# Altium PCB Power_Board_Board.PcbDoc
Units mm, origin at the board's own origin, x right, y up, seen from the top; angles counter-clockwise.
Board outline 180 x 200 mm, 2 copper layers (Top Layer, Bottom Layer), stack 1.671 mm thick; 109 components, 45 nets, 352 pads, 136 vias.
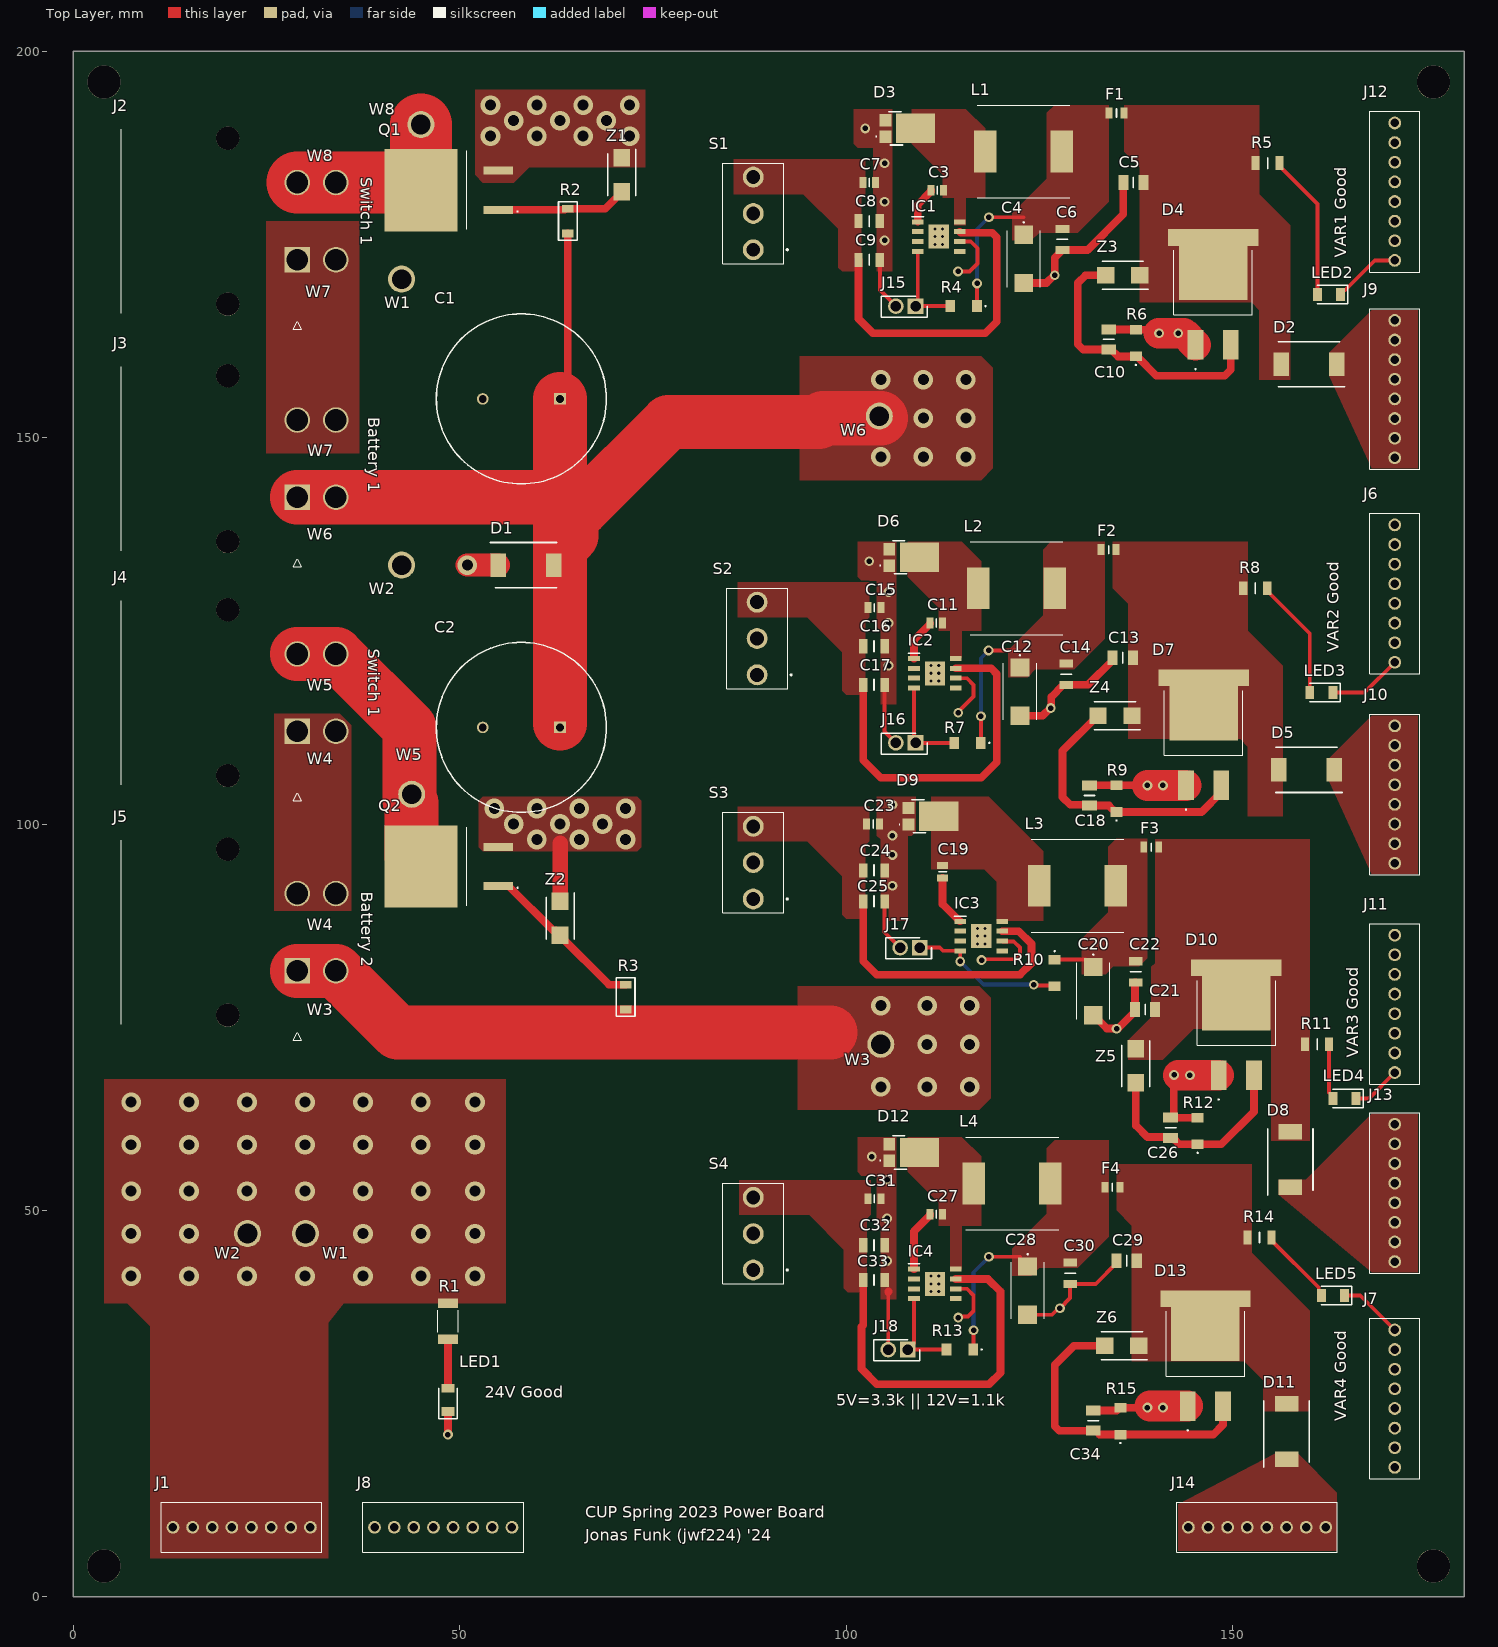
[diagram p0: Top Layer view]
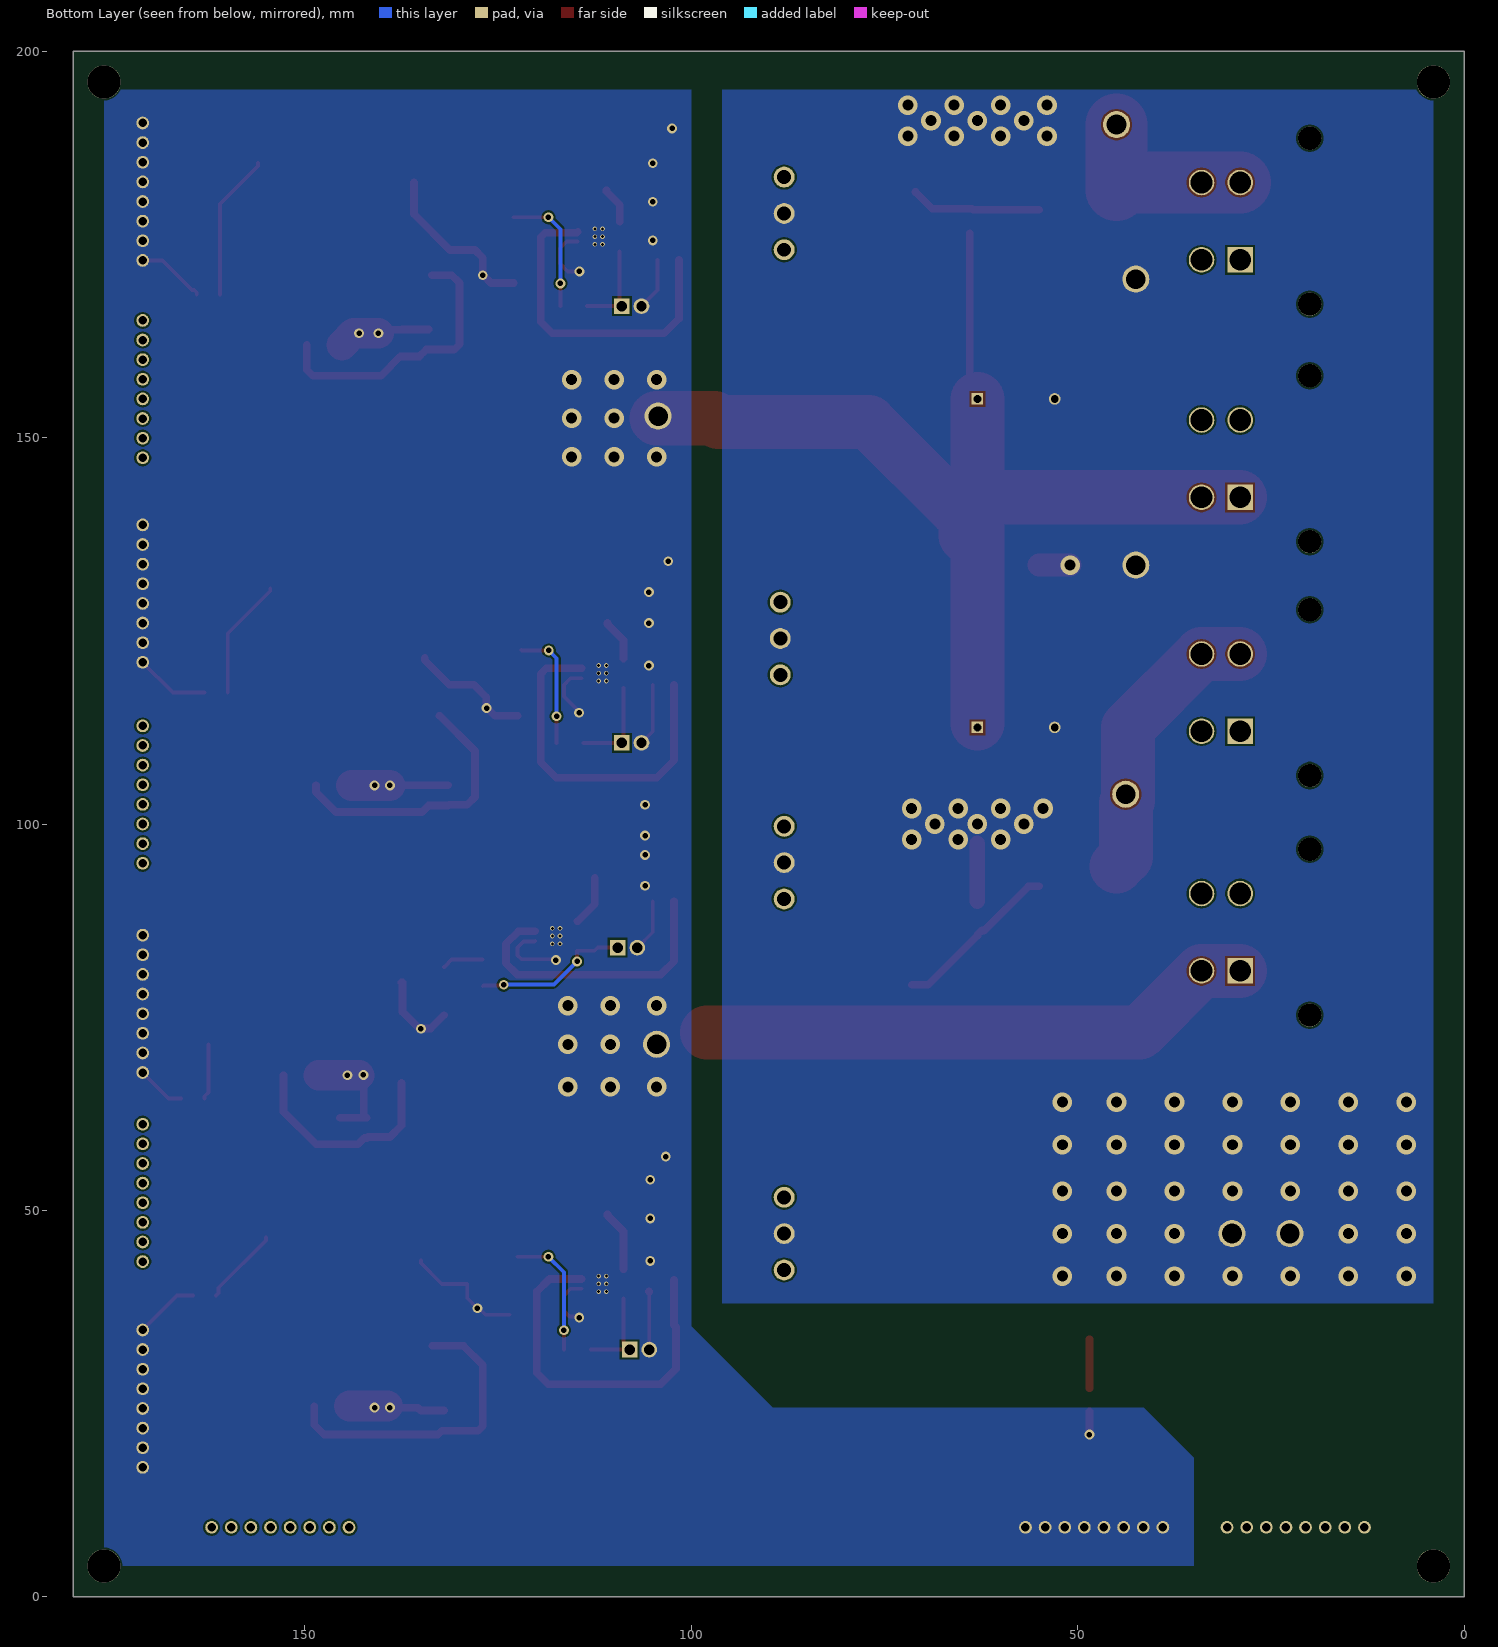
[diagram p1: Bottom Layer view, seen from below]

## Layer stack, top to bottom
Top Solder: solder mask 0.0102, Solder Resist, Dk 3.5
Top Layer: signal copper 0.0356
Dielectric 1: dielectric 1.6, FR-4, Dk 4.8
Bottom Layer: signal copper 0.0356
Bottom Solder: solder mask 0.0102, Solder Resist, Dk 3.5

## Board outline
0,0 180,0 180,200 0,200

## Design rules (kind name [scope] priority, off if disabled: settings)
Clearance Clearance_1 [All] p1: gap=0.254 ignorepadtopadclearanceinfootprint=FALSE except(0: Arc-Hole Track-Hole SMDPad-Hole THPad-Hole Via-Hole Fill-Hole Poly-Hole Region-Hole Text-Hole)
Clearance [All] p2: gap=0.3 ignorepadtopadclearanceinfootprint=FALSE
Height [All] p1: minheight=0 maxheight=41 prefheight=12.7
HoleSize [All] p1: absolutevalues=TRUE maxlimit=4.3 minlimit=0.025 maxpercent=80.000 minpercent=20.000
PolygonConnect [All] p1: connectstyle=Direct reliefconductorwidth=0.254 reliefentries=4 polygonreliefangle="90 Angle" airgapwidth=0.254
RoutingVias [All] p1: holewidth=0.3 width=0.6 viastyle="Through Hole" minholewidth=0.3 minwidth=0.6 maxholewidth=0.3 maxwidth=0.6
SilkToSolderMaskClearance [IsPad] p1: minsilkscreentomaskgap=0.1 clearancetoexposedcopper=TRUE
SolderMaskExpansion [All] p1: expansion=0.102 istentingtop=FALSE
Width [All] p1: maxlimit=8 minlimit=0.3 preferedwidth=0.5
27 further rules are at their usual default settings.

## Components (designator, comment, footprint, x,y, rotation, side; value= is the part's Value field where it differs from the comment)
C1 "4700uF" CAPPRD1000W80D2200H4100 63,155 r180 top
C2 "4700uF" CAPPRD1000W80D2200H4100 63,112.5 r180 top
C3 "10000pF" CAPC2012X95N 111.82,182 r0 top
C4 "330uF" T521X 123,173.12 r270 top
C5 "0.1uF" CAPC3216X190N 137.19,183 r180 top
C6 ".011uF" CAPC3216X95N 128,175.63 r270 top
C7 "10000pF" CAPC2012X95N 103,183 r0 top
C8 "4.7uF" CAPC3216X180N 103,178 r0 top
C9 "4.7uF" CAPC3216X180N 103,173 r0 top
C10 "0.1uF" CAPC3216X190N 134,162.69 r90 top
C11 "10000pF" CAPC2012X95N 111.68,126 r0 top
C12 "330uF" T521X 122.5,117.12 r270 top
C13 "0.1uF" CAPC3216X190N 135.81,121.5 r180 top
C14 ".011uF" CAPC3216X95N 128.5,119.37 r270 top
C15 "10000pF" CAPC2012X95N 103.68,128 r0 top
C16 "4.7uF" CAPC3216X180N 103.62,123 r0 top
C17 "4.7uF" CAPC3216X180N 103.62,118 r0 top
C18 "0.1uF" CAPC3216X190N 131.5,103.69 r90 top
C19 "10000pF" CAPC2012X95N 112.5,93.82 r90 top
C20 "330uF" T521X 132,78.38 r270 top
C21 "0.1uF" CAPC3216X190N 138.69,76 r180 top
C22 ".011uF" CAPC3216X95N 137.5,80.87 r270 top
C23 "10000pF" CAPC2012X95N 103.5,100 r0 top
C24 "4.7uF" CAPC3216X180N 103.62,94 r0 top
C25 "4.7uF" CAPC3216X180N 103.62,90 r0 top
C26 "0.1uF" CAPC3216X190N 142,60.69 r90 top
C27 "10000pF" CAPC2012X95N 111.68,49.5 r0 top
C28 "330uF" T521X 123.5,39.62 r270 top
C29 "0.1uF" CAPC3216X190N 136.31,43.5 r180 top
C30 ".011uF" CAPC3216X95N 129,41.87 r270 top
C31 "10000pF" CAPC2012X95N 103.68,51.5 r0 top
C32 "4.7uF" CAPC3216X180N 103.62,45.5 r0 top
C33 "4.7uF" CAPC3216X180N 103.62,41 r0 top
C34 "0.1uF" CAPC3216X190N 132,22.81 r90 top
D1 "SZ1.5SMC36AT3G" DIOM7958X256N 58.6,133.5 r0 top
D2 "SZ1.5SMC36AT3G" DIOM7958X256N 159.9,159.5 r180 top
D3 "c" PMEG045T100EPEZ 107.93,190 r270 top
D4 "S6055NRP" S6055NRP 147.5,170.5 r0 top
D5 "SZ1.5SMC36AT3G" DIOM7958X256N 159.6,107 r180 top
D6 "c" PMEG045T100EPEZ 108.43,134.5 r270 top
D7 "S6055NRP" S6055NRP 146.285,113.51 r0 top
D8 "SZ1.5SMC36AT3G" DIOM7958X256N 157.5,56.6 r90 top
D9 "c" PMEG045T100EPEZ 110.93,101 r270 top
D10 "S6055NRP" S6055NRP 150.5,76 r0 top
D11 "SZ1.5SMC36AT3G" DIOM7958X256N 157,21.4 r90 top
D12 "c" PMEG045T100EPEZ 108.43,57.5 r270 top
D13 "S6055NRP" S6055NRP 146.5,33.19 r0 top
F1 "MFU0805FF05000P100" FUSC2012X55N 135,192 r0 top
F2 "MFU0805FF05000P100" FUSC2012X55N 133.97,135.5 r0 top
F3 "MFU0805FF05000P100" FUSC2012X55N 139.5,97 r0 top
F4 "MFU0805FF05000P100" FUSC2012X55N 134.47,53 r0 top
IC1 "TPS5450DDAR" SOIC127P600X170-9N 112,176 r0 top
IC2 "TPS5450DDAR" SOIC127P600X170-9N 111.5,119.5 r0 top
IC3 "TPS5450DDAR" SOIC127P600X170-9N 117.5,85.5 r0 top
IC4 "TPS5450DDAR" SOIC127P600X170-9N 111.5,40.5 r0 top
J1 "282834-8" 2828348 30.7,9 r180 top
J2 "Bat 1" 42820-2XXY_1 29,173 r270 top
J3 "Switch 1" 42820-2XXY_1 29,142.27 r270 top
J4 "Bat 2" 42820-2XXY_1 29,112 r270 top
J5 "Switch 2" 42820-2XXY_1 29,81 r270 top
J6 "282834-8" 2828348 171,120.92 r90 top
J7 "282834-8" 2828348 171,34.54 r270 top
J8 "282834-8" 2828348 56.78,9 r180 top
J9 "282834-8" 2828348 171,147.38 r90 top
J10 "282834-8" 2828348 171,94.92 r90 top
J11 "282834-8" 2828348 171,67.84 r90 top
J12 "282834-8" 2828348 171,172.92 r90 top
J13 "282834-8" 2828348 171,43.38 r90 top
J14 "282834-8" 2828348 162.08,9 r180 top
J15 "PPPC021LFBN-RC" RHDR2W80P0X254_1X2_558X254X850P 109,167 r180 top
J16 "PPPC021LFBN-RC" RHDR2W80P0X254_1X2_558X254X850P 109,110.5 r180 top
J17 "PPPC021LFBN-RC" RHDR2W80P0X254_1X2_558X254X850P 109.54,84 r180 top
J18 "PPPC021LFBN-RC" RHDR2W80P0X254_1X2_558X254X850P 108,32 r180 top
L1 "15uH" WE-PD_1260/1245/1280/121054 122.95,187 r0 top
L2 "15uH" WE-PD_1260/1245/1280/121054 122.05,130.5 r0 top
L3 "15uH" WE-PD_1260/1245/1280/121054 129.95,92 r0 top
L4 "15uH" WE-PD_1260/1245/1280/121054 121.5,53.5 r0 top
LED1 "CMD15-21VYC_TR8" LEDC3215X130N 48.5,25.5 r90 top
LED2 "CMD15-21VYC_TR8" LEDC3215X130N 162.5,168.5 r180 top
LED3 "CMD15-21VYC_TR8" LEDC3215X130N 161.5,117 r180 top
LED4 "CMD15-21VYC_TR8" LEDC3215X130N 164.5,64.5 r180 top
LED5 "CMD15-21VYC_TR8" LEDC3215X130N 163,39 r180 top
Q1 "FQB47P06TM-AM002" FFSB0865BF085 46.555,182 r90 top
Q2 "FQB47P06TM-AM002" FFSB0865BF085 46.555,94.5 r90 top
R1 "1.1k" RESC5025X71N 48.5,35.663 r270 top
R2 "10K" 1206 64,178 r90 top value=18kR
R3 "10K" 1206 71.5,77.6 r90 top value=18kR
R4 "10k" ERJP08_(1206) 115.225,167 r180 top
R5 "147" RESC3216X70N 154.55,185.5 r0 top
R6 "3k" ERJP08_(1206) 137.5,162.225 r90 top
R7 "10k" ERJP08_(1206) 115.725,110.5 r180 top
R8 "147" RESC3216X70N 152.95,130.5 r0 top
R9 "3k" ERJP08_(1206) 135,103.275 r90 top
R10 "10k" ERJP08_(1206) 127,80.725 r270 top
R11 "147" RESC3216X70N 160.95,71.5 r0 top
R12 "3k" ERJP08_(1206) 145.5,60.275 r90 top
R13 "10k" ERJP08_(1206) 114.725,32 r180 top
R14 "147" RESC3216X70N 153.5,46.5 r0 top
R15 "3k" ERJP08_(1206) 135.5,22.725 r90 top
S1 "M2011SS1W03" M2011SS1W03 91.95,174.3 r0 top
S2 "M2011SS1W03" M2011SS1W03 92.45,119.3 r0 top
S3 "M2011SS1W03" M2011SS1W03 91.95,90.3 r0 top
S4 "M2011SS1W03" M2011SS1W03 91.95,42.3 r0 top
Z1 "SZ1SMB5925BT3G" DIOM5436X247N 71,184 r270 top
Z2 "SZ1SMB5925BT3G" DIOM5436X247N 63,87.8 r270 top
Z3 "SMBJ5352B-TP" DIOM5336X262N 135.8,171 r180 top
Z4 "SMBJ5352B-TP" DIOM5336X262N 134.8,114 r180 top
Z5 "SMBJ5352B-TP" DIOM5336X262N 137.5,68.7 r270 top
Z6 "SMBJ5352B-TP" DIOM5336X262N 135.7,32.5 r180 top

## Footprints (in the part's own frame and the unit in brackets; to place one, negate y for a bottom-side part, rotate by r counter-clockwise, add the part's x,y. Pads: shape width x height; smd on the part's side, far side on the other; paste and mask are expansions set on the pad)
1206 [mm]
  rect 1x1.5 smd: 1(-1.6,0) 2(1.6,0)
  silkscreen extent -2.5,-1.2 2.5,1.2
42820-2XXY_1 [mm]
  rect 3.3x3.3 hole 2.8: 1(0,0)
  round 3.3 hole 2.8: 2(0,5) 3(-10,0) 4(-10,5)
  round 3 hole 3 unplated: 5(5.73,-9) 6(-15.73,-9)
  silkscreen extent -16.91,-22.79 9,0.5, body extent -16.71,-22.51 7.11,6.08, height 14.1
2828348 [mm]
  round 1.65 hole 1.1: 1(0,0) 2(2.54,0) 3(5.08,0) 4(7.62,0) 5(10.16,0) 6(12.7,0) 7(15.24,0) 8(17.78,0)
  silkscreen extent -1.5,-3.25 19.28,3.25, body extent -1.5,-3.25 19.28,3.25, height 10.04
CAPC2012X95N [mm]
  rect 0.91x1.39 smd: 1(-0.82,0) 2(0.82,0)
  silkscreen extent 0,-0.53 0,0.53, body extent -1,-0.63 1,0.63, height 0.95
CAPC3216X95N [mm]
  rect 1.04x1.78 smd: 1(-1.37,0) 2(1.37,0)
  silkscreen extent 0,-0.7 0,0.7, body extent -1.6,-0.8 1.6,0.8, height 0.95
CAPC3216X180N [mm]
  rect 1.07x1.82 smd: 1(-1.38,0) 2(1.38,0)
  silkscreen extent 0,-0.7 0,0.7, body extent -1.6,-0.8 1.6,0.8, height 1.8
CAPC3216X190N [mm]
  rect 1.3x1.92 smd: 1(-1.31,0) 2(1.31,0)
  silkscreen extent 0,-0.7 0,0.7, body extent -1.6,-0.8 1.6,0.8, height 1.9
CAPPRD1000W80D2200H4100 [mm]
  rect 1.5x1.5 hole 1: 1(0,0)
  round 1.5 hole 1: 2(10,0)
  silkscreen extent -6,-11 16,11, body extent -6.23,-11.25 16.25,11.25, height 41
DIOM5336X262N [mm]
  rect 2.25x2.15 smd: 1(-2.2,0) 2(2.2,0)
  silkscreen extent -3.27,-1.81 2.67,1.81, body extent -2.67,-1.81 2.67,1.81, height 2.62
DIOM5436X247N [mm]
  rect 2.25x2.15 smd: 1(-2.2,0) 2(2.2,0)
  silkscreen extent -3.27,-1.81 2.7,1.81, body extent -2.7,-1.81 2.7,1.81, height 2.47
DIOM7958X256N [mm]
  rect 2x3.05 smd: 1(-3.6,0) 2(3.6,0)
  silkscreen extent -4.6,-2.92 3.97,2.92, body extent -3.97,-2.92 3.97,2.92, height 2.56
ERJP08_(1206) [mm]
  rect 1.25x1.55 smd: 1(-1.725,0) 2(1.725,0)
  silkscreen extent -2.88,-0.05 -2.78,0.05, body extent -1.6,-0.8 1.6,0.8, height 0.6
FFSB0865BF085 [mm]
  rect 1.05x3.8 smd: 1(-2.54,-8.445) 2(2.54,-8.445)
  rect 10.67x9.45 smd: 3(0,1.555)
  silkscreen extent -5.08,-11 5.08,-4.35, body extent -5.33,-9.85 5.34,6.03, height 5.45
FUSC2012X55N [mm]
  rect 0.89x1.42 smd: 1(-0.97,0) 2(0.97,0)
  silkscreen extent 0,-0.53 0,0.53, body extent -1,-0.63 1,0.63, height 0.55
LEDC3215X130N [mm]
  rect 1.15x1.7 smd: 1(-1.5,0) 2(1.5,0)
  silkscreen extent -2.42,-1.2 1.5,1.2
M2011SS1W03 [mm]
  round 2.7 hole 1.8: 1(-3.95,0) 2(-3.95,4.7) 3(-3.95,9.4)
  silkscreen extent -7.9,-1.8 0.55,11.2, body extent -9.94,-1.8 2.04,11.2, height 28.77
PMEG045T100EPEZ [mm]
  rect 1.6x1.54 smd: 1(1.065,-2.83) 2(-1.065,-2.83)
  rect 3.8x5.06 smd: 3(0,1.07)
  silkscreen extent -2.15,-4.05 2.15,-0.6, body extent -2.23,-3.4 2.22,3.4, height 0.97
RESC3216X70N [mm]
  rect 1.05x1.8 smd: 1(-1.55,0) 2(1.55,0)
  silkscreen extent 0,-0.7 0,0.7, body extent -1.6,-0.8 1.6,0.8, height 0.7
RESC5025X71N [mil]
  rect 47x104 smd: 1(-92,0) 2(92,0)
  silkscreen extent -55,-52 55,52, body extent -100,-50 100,50, height 26
RHDR2W80P0X254_1X2_558X254X850P [mm]
  rect 2.025x2.025 hole 1.35: 1(0,0)
  round 2.025 hole 1.35: 2(2.54,0)
  silkscreen extent -1.52,-1.27 4.41,1.46, body extent -1.52,-1.27 4.06,1.27, height 8.5
S6055NRP [mm]
  rect 2.03x3.81 smd: 1(-2.285,-8.51) 2(2.285,-8.51)
  rect 8.89x7.01 smd: 3(0,0.81)
  rect 11.68x2.16 smd: 4(0,5.395)
  silkscreen extent -5.08,-11.7 5.08,3.75
SOIC127P600X170-9N [mm]
  rect 1.525x0.65 smd: 1(-2.712,1.905) 2(-2.712,0.635) 3(-2.712,-0.635) 4(-2.712,-1.905) 5(2.712,-1.905) 6(2.712,-0.635) 7(2.712,0.635) 8(2.712,1.905)
  rect 2.6x3.1 smd: 9(0,0)
  silkscreen extent -3.47,2.58 -1.95,2.58, body extent -3.01,-2.45 3.01,2.45, height 1.57
T521X [mm]
  rect 2.37x2.43 smd: 1(-3.12,0) 2(3.12,0)
  silkscreen extent -4.77,-2.15 3.65,2.15, body extent -3.8,-2.3 3.8,2.3, height 4.31
WE-PD_1260/1245/1280/121054 [mm]
  rect 2.9x5.4 smd: 1(-4.95,0) 2(4.95,0)
  silkscreen extent -6,-6 6,6, body extent -6,-6 6,6, height 8

## Part data
C1 C2: library part 860010683032, "Capacitor", Manufacturer_Name="Wurth Elektronik", Mouser Part Number=710-860010683032, Datasheet Link=https://componentsearchengine.com/Datasheets/2/860010683032.pdf, Height=41mm, Manufacturer_Part_Number=860010683032, Mouser Price/Stock=https://www.mouser.co.uk/ProductDetail/Wurth-Elektronik/860010683032?qs=0KOYDY2FL2%252Biyra9tgGF6Q%3D%3D
C3 C7 C11 C15 C19 C23 C27 C31: library part GRM2195C1H103JA01D, "Capacitor", Manufacturer_Name="Murata Electronics", Mouser Part Number=81-GRM215C1H103JA01D, Arrow Part Number=GRM2195C1H103JA01D, Arrow Price/Stock=https://www.arrow.com/en/products/grm2195c1h103ja01d/murata-manufacturing?region=nac, Datasheet Link=https://psearch.en.murata.com/capacitor/product/GRM2195C1H103JA01%23.html, Height=0.95mm, Manufacturer_Part_Number=GRM2195C1H103JA01D, Mouser Price/Stock=https://www.mouser.co.uk/ProductDetail/Murata-Electronics/GRM2195C1H103JA01D?qs=WuXK2ZU3Btf4YpEuFd2mEg%3D%3D
C4 C12 C20 C28: library part T521X337M016ATE025, "Capacitor Polarised", Manufacturer_Name=KEMET, Mouser Part Number=80-T521X337M16ATE25, Arrow Part Number=T521X337M016ATE025, Arrow Price/Stock=https://www.arrow.com/en/products/t521x337m016ate025/kemet-corporation, Datasheet Link=https://content.kemet.com/datasheets/KEM_T2076_T52X-530.pdf, Height=4.3mm, Manufacturer_Part_Number=T521X337M016ATE025, Mouser Price/Stock=https://www.mouser.co.uk/ProductDetail/KEMET/T521X337M016ATE025?qs=1gHfTFoodzYrClDYqjFI7g%3D%3D
C5 C10 C13 C18 C21 C26 C29 C34: library part UMJ316BB7104KL8T, "Capacitor", Manufacturer_Name="TAIYO YUDEN", Mouser Part Number=963-UMJ316BB7104KL8T, Datasheet Link=https://drive.google.com/file/d/1fM7Vb6Bhj_-C9r1lyMtxyck3QU2kMTfJ/view?usp=sharing, Height=1.9mm, Manufacturer_Part_Number=UMJ316BB7104KL8T, Mouser Price/Stock=https://www.mouser.co.uk/ProductDetail/TAIYO-YUDEN/UMJ316BB7104KL8T?qs=DPoM0jnrROVD2ECNn%252BkKUw%3D%3D
C6 C14 C22 C30: library part GRM3195C1H113JA01D, "Capacitor", Manufacturer_Name="Murata Electronics", Mouser Part Number=81-GRM3195C1H113JA1D, Arrow Part Number=GRM3195C1H113JA01D, Arrow Price/Stock=https://www.arrow.com/en/products/grm3195c1h113ja01d/murata-manufacturing, Datasheet Link=https://datasheet.datasheetarchive.com/originals/distributors/Datasheets_SAMA/ec4f1577dddcc7a13ddad897a28002d3.pdf, Height=0.95mm, Manufacturer_Part_Number=GRM3195C1H113JA01D, Mouser Price/Stock=https://www.mouser.co.uk/ProductDetail/Murata-Electronics/GRM3195C1H113JA01D?qs=2xc37bZVjFj5Q80Tqu7yZg%3D%3D
C8 C9 C16 C17 C24 C25 C32 C33: library part GRM31CR71H475KA12L, "Capacitor", Manufacturer_Name="Murata Electronics", Mouser Part Number=81-GRM31CR71H475KA2L, Arrow Part Number=GRM31CR71H475KA12L, Arrow Price/Stock=https://www.arrow.com/en/products/grm31cr71h475ka12l/murata-manufacturing?region=nac, Datasheet Link=https://psearch.en.murata.com/capacitor/product/GRM31CR71H475KA12%23.html, Height=1.8mm, Manufacturer_Part_Number=GRM31CR71H475KA12L, Mouser Price/Stock=https://www.mouser.co.uk/ProductDetail/Murata-Electronics/GRM31CR71H475KA12L?qs=QOxk%252BkhTc6I%252BVQUsJuOHog%3D%3D
D1 D2 D5 D8 D11: "Diode", Manufacturer_Name=LITTELFUSE, Mouser Part Number=863-SZ1.5SMC36AT3G, Datasheet Link=https://ru.mouser.com/datasheet/2/240/Littelfuse_TVS_Diode_SZ1_5SMCxxA_Datasheet.pdf-1317300.pdf, Height=2.56mm, Manufacturer_Part_Number=SZ1.5SMC36AT3G, Mouser Price/Stock=https://www.mouser.co.uk/ProductDetail/Littelfuse/SZ1.5SMC36AT3G?qs=sK5eIuwOod6Y2gxgy5q9QA%3D%3D
D3 D6 D9 D12: library part PMEG045T100EPEZ, "Schottky Diode", Manufacturer_Name=Nexperia, Mouser Part Number=771-PMEG045T100EPEZ, Arrow Part Number=PMEG045T100EPEZ, Arrow Price/Stock=https://www.arrow.com/en/products/pmeg045t100epez/nexperia?region=nac, Datasheet Link=https://assets.nexperia.com/documents/data-sheet/PMEG045T100EPE.pdf, Height=0.99mm, Manufacturer_Part_Number=PMEG045T100EPEZ, Mouser Price/Stock=https://www.mouser.co.uk/ProductDetail/Nexperia/PMEG045T100EPEZ?qs=sPbYRqrBIVkxZoatAqKzuA%3D%3D
D4 D7 D10 D13: "SCR", Manufacturer_Name=LITTELFUSE, Mouser Part Number=576-S6055NRP, Arrow Part Number=S6055NRP, Arrow Price/Stock=https://www.arrow.com/en/products/s6055nrp/littelfuse?region=nac, Datasheet Link=https://componentsearchengine.com/Datasheets/1/S6055NRP.pdf, Height=4.78mm, Manufacturer_Part_Number=S6055NRP, Mouser Price/Stock=https://www.mouser.co.uk/ProductDetail/Littelfuse/S6055NRP?qs=HR2RnyOI4E77OLmw5dSgJg%3D%3D
F1 F2 F3 F4: "Fuse", Manufacturer_Name=Vishay, Mouser Part Number=594-MFU0805FF05000P1, Arrow Part Number=MFU0805FF05000P100, Arrow Price/Stock=https://www.arrow.com/en/products/mfu0805ff05000p100/vishay?region=nac, Datasheet Link=https://componentsearchengine.com/Datasheets/2/MFU0805FF05000P100.pdf, Height=0.55mm, Manufacturer_Part_Number=MFU0805FF05000P100, Mouser Price/Stock=https://www.mouser.co.uk/ProductDetail/Vishay-Beyschlag/MFU0805FF05000P100?qs=oI046glRurutd5qa47HBXA%3D%3D
IC1 IC2 IC3 IC4: "Integrated Circuit", Manufacturer_Name="Texas Instruments", Mouser Part Number=595-TPS5450DDAR, Arrow Part Number=TPS5450DDAR, Arrow Price/Stock=https://www.arrow.com/en/products/tps5450ddar/texas-instruments?region=nac, Datasheet Link=http://www.ti.com/general/docs/suppproductinfo.tsp?distId=10&gotoUrl=http%3A%2F%2Fwww.ti.com%2Flit%2Fgpn%2Ftps5450, Height=1.7mm, Manufacturer_Part_Number=TPS5450DDAR, Mouser Price/Stock=https://www.mouser.co.uk/ProductDetail/Texas-Instruments/TPS5450DDAR?qs=h%2FYsCRHtaqPaz8oWBdcCug%3D%3D
J1 J6 J7 J8 J9 J10 J11 J12 J13 J14: "Connector", Manufacturer_Name="TE Connectivity", Mouser Part Number=571-282834-8, Arrow Part Number=282834-8, Arrow Price/Stock=https://www.arrow.com/en/products/282834-8/te-connectivity?region=nac, Datasheet Link=https://www.te.com/commerce/DocumentDelivery/DDEController?Action=showdoc&DocId=Customer+Drawing%7F282834%7FC1%7Fpdf%7FEnglish%7FENG_CD_282834_C1.pdf%7F282834-9, Height=10.3mm, Manufacturer_Part_Number=282834-8, Mouser Price/Stock=https://www.mouser.co.uk/ProductDetail/TE-Connectivity/282834-8?qs=A%252Bip%252BNCYi6OmCuLnrGmJlA%3D%3D
J2 J3 J4 J5: library part 42820-2214, "Connector", Manufacturer_Name=Molex, Mouser Part Number=538-42820-2214, Datasheet Link=https://www.molex.com/pdm_docs/sd/428204224_sd.pdf, Height=14.1mm, Manufacturer_Part_Number=42820-2214, Mouser Price/Stock=https://www.mouser.co.uk/ProductDetail/Molex/42820-2214?qs=c8NFF48pVsDmrlzUGa%2Fydg%3D%3D
J15 J16 J17 J18: "Connector", Manufacturer_Name=Sullins, Datasheet Link=http://www.sullinscorp.com/drawings/78_P(N)PxCxxxLFBN-RC,_10492-H.pdf, Height=8.5mm, Manufacturer_Part_Number=PPPC021LFBN-RC
L1 L2 L3 L4: library part 7447709150, "Inductor", Manufacturer_Name="Wurth Elektronik", Mouser Part Number=710-7447709150, Manufacturer_Part_Number=7447709150, Mouser Price/Stock=https://www.mouser.co.uk/ProductDetail/Wurth-Elektronik/7447709150?qs=E%2F%2FhvbtCqpNBWEYVOlGQNA%3D%3D
LED1 LED2 LED3 LED4 LED5: "LED", Arrow Part Number=CMD15-21VYC/TR8, Manufacturer_Name="Visual Communications Company", Mouser Part Number=606-CMD15-21VYC, Arrow Price/Stock=https://www.arrow.com/en/products/cmd15-21vyctr8/visual-communications, Datasheet Link=http://www.farnell.com/datasheets/2059686.pdf?_ga=1.173230763.922535262.1491543497, Height=1.3mm, Manufacturer_Part_Number=CMD15-21VYC/TR8, Mouser Price/Stock=https://www.mouser.com/Search/Refine.aspx?Keyword=606-CMD15-21VYC
Q1 Q2: "MOSFET (P-Channel)", Manufacturer_Name=onsemi, Mouser Part Number=512-FQB47P06TM_AM002, Arrow Part Number=FQB47P06TM-AM002, Arrow Price/Stock=https://www.arrow.com/en/products/fqb47p06tm-am002/on-semiconductor?region=nac, Datasheet Link=https://www.onsemi.com/pub/Collateral/FQB47P06-D.PDF, Manufacturer_Part_Number=FQB47P06TM-AM002, Mouser Price/Stock=https://www.mouser.co.uk/ProductDetail/ON-Semiconductor-Fairchild/FQB47P06TM-AM002?qs=0lQeLiL1qyZm9vEILtA4gw%3D%3D
R1: library part CRCW20101K10FKEF, "SMD 3/4watt 1.1Kohms 1% 100ppm", Manufacturer_Name=Vishay, Manufacturer_Part_Number=CRCW20101K10FKEF
R2 R3: library part ERJ-P08J183V, "Res Thick Film 1206 18K Ohm 5% 1/3W ±200ppm/°C Molded SMD SMD Punched Carrier T/R", Case Code (Imperial)=1206, Case Code (Metric)=3216, Manufacturer=Panasonic, Max Operating Temperature=155°C, Max Power Dissipation=333mW, Min Operating Temperature=-55°C, Package Quantity=5000, Power Rating=660mW, Resistor Type="Thick Film", Temperature Coefficient=200ppm/°C, Tolerance=5%, Voltage Rating=500V, Voltage Rating (DC)=200V, Case/Package=1206, Category="Chip SMD Resistors", ComponentLink1Description=http://www.mouser.com/ds/2/315/AOA0000CE4-64075.pdf?src-supplier=Mouser, ComponentLink1URL=http://www.mouser.com/ds/2/315/AOA0000CE4-64075.pdf?src-supplier=Mouser, ComponentLink2Description=http://www.onlinecomponents.com/datasheet/erj-p08j183v.aspx?p=44454764&src-supplier=Onlinecomponents.com, ComponentLink2URL=http://www.onlinecomponents.com/datasheet/erj-p08j183v.aspx?p=44454764&src-supplier=Onlinecomponents.com, ComponentLink3Description=http://industrial.panasonic.com/www-data/pdf/AOA0000/AOA0000CE4.pdf?src-supplier=Avnet, ComponentLink3URL=http://industrial.panasonic.com/www-data/pdf/AOA0000/AOA0000CE4.pdf?src-supplier=Avnet, ComponentLink4Description=https://industrial.panasonic.com/cdbs/www-data/pdf/RDO0000/AOA0000C331.pdf?src-supplier=Digi-Key, ComponentLink4URL=https://industrial.panasonic.com/cdbs/www-data/pdf/RDO0000/AOA0000C331.pdf?src-supplier=Digi-Key, Contact Plating=Tin, Height=0.028inch, Lead Free="Contains Lead", Length=0.126inch, Manufacturer Part Number=ERJ-P08J183V, Mounting Technology="Surface Mount", Number of Terminations=2, Packaging="Tape and Reel", Pricing 1="1=0.14350, 10=0.11750, 25=0.11650, 100=0.04920, 250=0.04770, 500=0.04720, 1000=0.02830, 3000=0.01870 (USD)", Radiation Hardening=No, RoHS=Yes, RoHS Compliant=Yes, Series=ERJ, Stock 1=3580, Supplier 1="Arrow Electronics", Supplier Part Number 1=ERJ-P08J183V, Termination=SMD/SMT, Width=1.6mm
R4 R7 R10 R13: library part ERJ-P08J103V, "Resistor", Manufacturer_Name=Panasonic, Mouser Part Number=667-ERJ-P08J103V, Arrow Part Number=ERJ-P08J103V, Arrow Price/Stock=https://www.arrow.com/en/products/erj-p08j103v/panasonic, Datasheet Link=http://industrial.panasonic.com/cdbs/www-data/pdf/RDO0000/AOA0000C331.pdf, Height=0.7mm, Manufacturer_Part_Number=ERJ-P08J103V, Mouser Price/Stock=https://www.mouser.com/Search/Refine.aspx?Keyword=667-ERJ-P08J103V
R5 R8 R11 R14: library part RK73H2BTTD1470F, "Resistor", Manufacturer_Name="KOA Speer", Datasheet Link=http://www.koaspeer.com/catimages/Products/RK73H/RK73H.pdf, Height=0.7mm, Manufacturer_Part_Number=RK73H2BTTD1470F
R6 R9 R12 R15: library part ERJ-P08J302V, "Resistor", Manufacturer_Name=Panasonic, Mouser Part Number=667-ERJ-P08J302V, Datasheet Link=http://industrial.panasonic.com/cdbs/www-data/pdf/RDO0000/AOA0000C331.pdf, Height=0.7mm, Manufacturer_Part_Number=ERJ-P08J302V, Mouser Price/Stock=https://www.mouser.com/Search/Refine.aspx?Keyword=667-ERJ-P08J302V
S1 S2 S3 S4: "Switch", Manufacturer_Name="NKK Switches", Mouser Part Number=633-M2011SS1W03, Arrow Part Number=M2011SS1W03, Arrow Price/Stock=https://www.arrow.com/en/products/m2011ss1w03/nkk-switches?region=nac, Datasheet Link=https://www.arrow.com/en/products/m2011ss1w03/nkk-switches, Height=28.8mm, Manufacturer_Part_Number=M2011SS1W03, Mouser Price/Stock=https://www.mouser.co.uk/ProductDetail/NKK-Switches/M2011SS1W03?qs=tJISjqPx8tixbHF6uPAmWg%3D%3D
Z1 Z2: "Zener Diode", Manufacturer_Name=onsemi, Mouser Part Number=863-SZ1SMB5925BT3G, Arrow Part Number=SZ1SMB5925BT3G, Arrow Price/Stock=https://www.arrow.com/en/products/sz1smb5925bt3g/on-semiconductor, Datasheet Link=http://www.onsemi.com/pub/Collateral/1SMB5913BT3-D.PDF, Height=2.47mm, Manufacturer_Part_Number=SZ1SMB5925BT3G, Mouser Price/Stock=https://www.mouser.co.uk/ProductDetail/ON-Semiconductor/SZ1SMB5925BT3G?qs=PJJcWtbOkNWGzKmay6pYIA%3D%3D
Z3 Z4 Z5 Z6: "Zener Diode", Manufacturer_Name=MCC, Mouser Part Number=833-SMBJ5352B-TP, Arrow Part Number=SMBJ5352B-TP, Arrow Price/Stock=https://www.arrow.com/en/products/smbj5352b-tp/micro-commercial-components, Datasheet Link=https://www.mccsemi.com/pdf/Products/SMBJ5338B-SMBJ5388B(SMB).pdf, Height=2.62mm, Manufacturer_Part_Number=SMBJ5352B-TP, Mouser Price/Stock=https://www.mouser.co.uk/ProductDetail/Micro-Commercial-Components-MCC/SMBJ5352B-TP?qs=ZNK0BnemlqH0SS%2FVsVpXVw%3D%3D

## Free pads (board coordinates)
  round 4.3 hole 4.3 unplated: 1(4,196) 2(176,196) 3(176,4) 4(4,4)
  round 3.5 hole 2.54: 5(42.5,170.5) 6(22.565,47.011) 6(30.065,47.011) 6(42.5,133.5) 6(104.309,152.777) 6(104.5,71.5) 7(43.809,103.847) 7(45,190.5)

## Via types
v1: diameter 2.54, hole 1.422, Top Layer to Bottom Layer, tented both sides, 71 vias
v2: diameter 1.27, hole 0.711, Top Layer to Bottom Layer, tented both sides, 41 vias
v3: diameter 0.6, hole 0.4, Top Layer to Bottom Layer, tented both sides, 24 vias

## Nets (pads, with @x,y where several pads share a name; then routed paths per layer and width w, separated by ;. In a path a pad name is that pad's centre, name@x,y a point inside that pad or via, vN(x,y) a via of type N, cw(c..) or ccw(c..) an arc to the next point about the centre after c; other vN are vias at no path point)
"+24 V": C1.2 C2.2 D1.1 J1.1 J1.2 J1.3 J1.4 J1.5 J1.6 J1.7 J1.8 pad.5 pad.6@22.565,47.011 pad.6@30.065,47.011 pad.6@42.5,133.5 Q1.2 Q2.2 R1.1 S1.2 S2.2 S3.2 S4.2 Z1.1 Z2.1 | length 11.5
  Top Layer w2: Z2.1 63,97.5
  Top Layer w3: v1(51,133.5) D1.1
  other v1: 7.5,41.5 15,41.5 22.5,41.5 30,41.5 37.5,41.5 45,41.5 52,41.5 7.5,47 15,47 37.5,47 45,47 52,47 7.5,52.5 15,52.5 22.5,52.5 30,52.5 37.5,52.5 45,52.5 52,52.5 7.5,58.5 15,58.5 22.5,58.5 30,58.5 37.5,58.5 45,58.5 52,58.5 7.5,64 15,64 22.5,64 30,64 37.5,64 45,64 52,64 60,98 65.5,98 71.5,98 57,100 63,100 68.5,100 54.5,102 60,102 65.5,102 71.5,102 54,189 60,189 66,189 72,189 57,191 63,191 69,191 54,193 60,193 66,193 72,193
GND: C1.1 C2.1 C4.2 C5.2 C6.2 C7.2 C8.2 C9.2 C10.2 C12.2 C13.2 C14.2 C15.2 C16.2 C17.2 C18.2 C20.2 C21.2 C22.2 C23.2 C24.2 C25.2 C26.2 C28.2 C29.2 C30.2 C31.2 C32.2 C33.2 C34.2 D1.2 D3.1 D3.2 D4.1 D6.1 D6.2 D7.1 D9.1 D9.2 D10.1 D12.1 D12.2 D13.1 IC1.6 IC1.9 IC2.6 IC2.9 IC3.6 IC3.9 IC4.6 IC4.9 J3.1 J3.2 J5.1 J5.2 J6.1 J6.2 J6.3 J6.4 J6.5 J6.6 J6.7 J6.8 J7.1 J7.2 J7.3 J7.4 J7.5 J7.6 J7.7 J7.8 J8.1 J8.2 J8.3 J8.4 J8.5 J8.6 J8.7 J8.8 J11.1 J11.2 J11.3 J11.4 J11.5 J11.6 J11.7 J11.8 J12.1 J12.2 J12.3 J12.4 J12.5 J12.6 J12.7 J12.8 J15.2 J16.2 J17.2 J18.2 LED1.1 LED2.1 LED3.1 LED4.1 LED5.1 pad.6@104.5,71.5 pad.6@104.309,152.777 R2.1 R3.1 R6.2 R9.2 R12.2 R15.2 | length 434.5
  Top Layer w0.5: C9.2 104.38,169.08 J15.2 ; C25.2 105,86 J17.2 ; C17.2 105,111.96 J16.2 ; J18.2 105.46,39.46 ; IC4.6 115.635,39.865 116.5,39 116.5,37 115.788,36.288 114.662,36.288 v2(114.515,36.141) ; IC2.6 115.635,118.865 116.5,118 116.5,116.5 v2@114.5,114.5 ; v2(114.5,171.5) 116,171.5 117,172.5 117,174.5 116.135,175.365 IC1.6 ; v2(117.535,82.386) 117.649,82.5 122,82.5 122.5,83 122.5,84 121.71,84.79 120.287,84.79 IC3.6 ; C28.2 126.64,36.5 127.475,37.335 v2(127.683,37.335) 129,38.652 C30.2 132.31,40.5 135,43.19 C29.2 ; LED3.1 167.08,117 J6.1 ; LED2.1 164,168.775 164.325,169.1 164.6,169.1 168.42,172.92 J12.1 ; LED5.1 166.54,39 J7.1 ; LED4.1 167.66,64.5 J11.1
  Top Layer w1: v2(48.5,21) LED1.1 ; C1.1 64,156 R2.1 ; 105.46,39.46 105.5,39.5 ; C12.2 125.427,114 126.427,115 v2(126.5,115) 126.552,115.052 126.552,116.422 128.13,118 C14.2 131.31,118 134.5,121.19 C13.2 ; C4.2 125.927,170 126.927,171 v2(127,171) 127,173.26 C6.2 131.26,174.26 135.88,178.88 C5.2 ; C18.2 R9.2 v2(139,105) ; C34.2 135.02,24.12 135.35,24.45 R15.2 135.525,24.475 138.975,24.475 v2(139,24.5) ; C20.2 132.03,75.26 133.738,73.552 134.948,73.552 v2(135,73.5) 135.052,73.552 135.242,73.552 137.38,75.69 C21.2 137.38,79.48 137.4,79.5 C22.2 ; C10.2 134.025,163.975 137.475,163.975 R6.2 139.977,163.95 140.427,163.5 v2(140.5,163.5) ; C26.2 C26.2@142.242,62 ; v2(142.444,67.535) 142.392,67.483 142.392,62.15 C26.2@142.242,62 ; R12.2 C26.2@142.242,62
  Top Layer w4: v2(139,105) D7.1 ; v2@139.32,24.68 D13.1 ; v2(140.5,163.5) v2(143,163.5) 143.705,163.5 D4.1 ; v2@143.01,67.49 D10.1
  Top Layer w7: J5.1 J5.2 42,73 98,73 ; J3.1 J3.2 64.23,142.27 ; C2.1@63,113 63,135.8 ; C1.1 63,143.5 64.23,142.27 ; 64.5,142 64.5,137.3 63,135.8 ; 65.77,140.73 77.04,152 96.5,152 97,152.5 pad.6@104.5,152.5 ; 63,135.8 63,141.04 64.23,142.27
  other v1: 104.5,66 110.5,66 116,66 110.5,71.5 116,71.5 104.5,76.5 110.5,76.5 116,76.5 104.5,147.5 110,147.5 115.5,147.5 110,152.5 115.5,152.5 104.5,157.5 110,157.5 115.5,157.5
  other v2: 141,24.5 105.323,43.469 105.323,48.969 105.323,53.969 103.323,56.969 144.5,67.5 106,92 106,96 106,98.5 106,102.5 141.001,105 114.535,114.386 105.5,120.5 105.5,126 105.5,130 103,134 105,175.5 105,180.5 105,185.5 102.5,190
  other v3: 111,39.5 112,39.5 111,40.5 112,40.5 111,41.5 112,41.5 117,84.5 118,84.5 117,85.5 118,85.5 117,86.5 118,86.5 111,118.5 112,118.5 111,119.5 112,119.5 111,120.5 112,120.5 111.5,175 112.5,175 111.5,176 112.5,176 111.5,177 112.5,177
NetC3_1: C3.1 IC1.1 | length 4.8
  Top Layer w1: IC1.1 109.288,180.138 111,181.85 C3.1
NetC3_2: C3.2 D3.3 IC1.8 L1.1
NetC5_1: C5.1 D2.2 D4.3 D4.4 F1.2 R5.1 Z3.1
NetC7_1: C7.1 C8.1 C9.1 IC1.7 S1.3 | length 42.9
  Top Layer w1: C9.1 101.62,165.38 103.5,163.5 118,163.5 119.5,165 119.5,175.914 118.914,176.5 114.847,176.5 IC1.7
NetC10_1: C10.1 D4.2 R6.1 Z3.2 | length 36.9
  Top Layer w1: Z3.2 131,171 130,170 130,162.086 130.706,161.38 C10.1 134.31,161.38 135.19,160.5 R6.1 137.65,160.5 140.15,158 149,158 149.785,158.785 D4.2
NetC11_1: C11.1 IC2.1 | length 5.5
  Top Layer w1: IC2.1 108.788,123.778 110.86,125.85 C11.1
NetC11_2: C11.2 D6.3 IC2.8 L2.1
NetC13_1: C13.1 D5.2 D7.3 D7.4 F2.2 R8.1 Z4.1
NetC15_1: C15.1 C16.1 C17.1 IC2.7 S2.3 | length 45.8
  Top Layer w1: C17.1 102.24,108.26 104.5,106 117.5,106 119.5,108 119.5,119.414 118.779,120.135 IC2.7
NetC18_1: C18.1 D7.2 R9.1 Z4.2 | length 35.8
  Top Layer w1: Z4.2 132.55,114 128,109.45 128,103.5 129,102.5 131.38,102.5 C18.1 134.02,102.38 134.85,101.55 R9.1 146.01,101.55 148.57,104.11 D7.2
NetC19_1: C19.1 IC3.1 | length 6.6
  Top Layer w1: C19.1 112.5,89.606 114.701,87.405 IC3.1
NetC19_2: C19.2 D9.3 IC3.8 L3.1
NetC21_1: C21.1 D8.2 D10.3 D10.4 F3.2 R11.1 Z5.1
NetC23_1: C23.1 C24.1 C25.1 IC3.7 S3.3 | length 37.8
  Top Layer w1: C25.1 102.24,82.26 104,80.5 122.5,80.5 124,82 124,84.5 122.365,86.135 IC3.7
NetC26_1: C26.1 D10.2 R12.1 Z5.2 | length 28.3
  Top Layer w1: Z5.2 137.5,61 139,59.5 141.88,59.5 C26.1 142.31,59.38 143.14,58.55 R12.1 148.55,58.55 152.785,62.785 D10.2
NetC27_1: C27.1 IC4.1 | length 8
  Top Layer w1: IC4.1 108.788,47.278 110.86,49.35 C27.1
NetC27_2: C27.2 D12.3 IC4.8 L4.1
NetC29_1: C29.1 D11.2 D13.3 D13.4 F4.2 R14.1 Z6.1
NetC31_1: C31.1 C32.1 C33.1 IC4.7 S4.3 | length 48
  Top Layer w1: C33.1 102.24,35.183 102,34.942 102,29.5 104,27.5 118.5,27.5 120,29 120,39.5 118.365,41.135 IC4.7
NetC34_1: C34.1 D13.2 R15.1 Z6.2 | length 40.6
  Top Layer w1: Z6.2 129.5,32.5 127,30 127,22.086 127.586,21.5 C34.1 132.31,21.5 132.81,21 R15.1 147.5,21 148.785,22.285 D13.2
NetIC1_4: IC1.4 J15.1 R4.2 | length 11.7
  Top Layer w0.5: IC1.4 109.288,167.288 J15.1 R4.2
NetIC2_4: IC2.4 J16.1 R7.2 | length 12.2
  Top Layer w0.5: IC2.4 108.788,110.712 J16.1 R7.2
NetIC3_4: IC3.4 J17.1 R10.2 | length 20.3
  Top Layer w0.5: J17.1 112.124,84 112.529,83.595 IC3.4 v2(114.788,82.212) ; v2(124.288,79.212) 124.394,79.106 126.894,79.106 R10.2
  Bottom Layer w0.5: v2(114.788,82.212) 117.788,79.212 v2(124.288,79.212)
NetIC4_4: IC4.4 J18.1 R13.2 | length 11.9
  Top Layer w0.5: IC4.4 108.788,32.788 J18.1 R13.2
NetJ2_1: J2.1 J2.2 J3.3 J3.4
NetJ2_3: J2.3 J2.4 pad.7@45,190.5 Q1.3 | length 24.8
  Top Layer w8: J2.3 J2.4 44.275,183 Q1.3@45,182.275 ; Q1.3 Q1.3@45,182.275 ; pad.7@45,190.5 Q1.3@45,182.275
NetJ4_1: J4.1 J4.2 J5.3 J5.4
NetJ4_3: J4.3 J4.4 pad.7@43.809,103.847 Q2.3 | length 37.1
  Top Layer w7: J4.3 J4.4 43.5,112.5 43.5,103 43.775,102.725 43.775,95.725 Q2.3
NetLED1_2: LED1.2 R1.2 | length 6.3
  Top Layer w1: LED1.2 R1.2
NetLED2_2: LED2.2 R5.2 | length 19
  Top Layer w0.5: R5.2 156.1,185.125 161,180.225 LED2.2
NetLED3_2: LED3.2 R8.2 | length 15.8
  Top Layer w0.5: R8.2 154.5,130.125 160,124.625 LED3.2
NetLED4_2: LED4.2 R11.2 | length 7.2
  Top Layer w0.5: R11.2 162.5,65.275 163,64.775 LED4.2
NetLED5_2: LED5.2 R14.2 | length 10.2
  Top Layer w0.5: R14.2 155.05,46.125 161.175,40 161.175,39.325 LED5.2
NetQ1_1: Q1.1 R2.2 Z1.2 | length 17
  Top Layer w1: Q1.1 63.61,179.46 63.75,179.6 R2.2 68.85,179.6 71,181.75 Z1.2
NetQ2_1: Q2.1 R3.2 Z2.2 | length 21.8
  Top Layer w1: Q2.1 56.375,91.96 62.11,86.225 62.425,86.225 63,85.65 Z2.2 63,85.55 69.35,79.2 R3.2
Out_1: D2.1 J9.1 J9.2 J9.3 J9.4 J9.5 J9.6 J9.7 J9.8
Out_2: D5.1 J10.1 J10.2 J10.3 J10.4 J10.5 J10.6 J10.7 J10.8
Out_3: D8.1 J13.1 J13.2 J13.3 J13.4 J13.5 J13.6 J13.7 J13.8
Out_4: D11.1 J14.1 J14.2 J14.3 J14.4 J14.5 J14.6 J14.7 J14.8
VAR1: C4.1 C6.1 F1.1 L1.2 R4.1 | length 16.6
  Top Layer w0.5: R4.1 v2(116.95,169.95) ; v2(118.5,178.5) 123,178.5
  Bottom Layer w0.5: v2(116.95,169.95) 116.95,176.95 v2(118.5,178.5)
VAR2: C12.1 C14.1 F2.1 L2.2 R7.1 | length 15.9
  Top Layer w0.5: R7.1 v2(117.45,113.95) ; v2(118.45,122.45) 121.95,122.45 122,122.5
  Bottom Layer w0.5: v2(117.45,113.95) 117.45,121.45 v2(118.45,122.45)
VAR3: C20.1 C22.1 F3.1 L3.2 R10.1 | length 5.4
  Top Layer w0.5: R10.1 131.02,82.45 131.97,81.5 C20.1
VAR4: C28.1 C30.1 F4.1 L4.2 R13.1 | length 16.8
  Top Layer w0.5: R13.1 116.475,32.025 116.475,34.475 v2(116.5,34.5) ; v2(118.5,44) 122.5,44
  Bottom Layer w0.5: v2(116.5,34.5) 116.5,42 v2(118.5,44)
pads on no net: IC1.2 IC1.3 IC1.5 IC2.2 IC2.3 IC2.5 IC3.2 IC3.3 IC3.5 IC4.2 IC4.3 IC4.5 J2.5 J2.6 J3.5 J3.6 J4.5 J4.6 J5.5 J5.6 S1.1 S2.1 S3.1 S4.1

## Polygon pours and split planes (outlines as drawn)
GND on Top Layer "Top Layer-GND" (solid, pour order 39): 108,98.5 108.5,98.5 109,99 109,103.5 104,103.5 104,98.5 104.5,98 104.5,87.5 108,87.5
"+24 V" on Top Layer "+24_V_L01_P020" (solid, pour order 20): 4,67 56,67 56,38 35,38 33,35.5 33,5 10,5 10,35 7,38 4,38
NetJ2_1 on Top Layer "NETJ2_1_L01_P001" (solid, pour order 1): 25,178 25,148 37,148 37,178
NetJ4_1 on Top Layer "NETJ4_1_L01_P057" (solid, pour order 57): 26,114.25 34.5,114.25 36,112.75 36,88.75 26,88.75
Out_4 on Top Layer "OUT_4_L01_P055" (solid, pour order 55): 155.5,18.5 158.5,18.5 163.5,13.5 163.5,6 143,6 143,12
Out_3 on Top Layer "OUT_3_L01_P053" (solid, pour order 53): 156,52 156,54 159.5,54 168,62.5 174,62.5 174,42 168,42
NetC29_1 on Top Layer "NETC29_1_L01_P052" (solid, pour order 52): 135,56 135,50 137,48 137,30.5 151.5,30.5 154,28 154,24 160,24 160,37 152.5,44.5 152.5,56
VAR4 on Top Layer "VAR4_L01_P051" (solid, pour order 51): 125.998,58.075 126.998,59.075 133.998,59.075 133.998,46.575 129.998,42.575 124.998,42.575 123.998,41.575 121.498,41.575 121.498,45.075 125.998,49.575
NetC27_2 on Top Layer "Top Layer-NetC11_2" (solid, pour order 50): 113.5,42.405 115,42.405 115,48 117.5,48 117.5,57 115,59.5 108,59.5 108,55 112,51 112,48 113.5,48
GND on Top Layer "GND_L01_P049" (solid, pour order 49): 106.5,59.5 106.5,38.5 104.5,38.5 104.5,48 104,48.5 104,54.5 102,54.5 101.5,55 101.5,59.5
NetC31_1 on Top Layer "NETC31_1_L01_P048" (solid, pour order 48): 86.216,49.413 86.216,53.913 103.216,53.913 103.216,49.413 102.716,48.913 102.716,39.413 100.216,39.413 99.716,39.913 99.716,44.913 95.216,49.413 87.216,49.413 86.216,50.413 87.216,49.413
NetC21_1 on Top Layer "Top Layer-NetC21_1" (solid, pour order 47): 136.5,69.5 141,69.5 145,73.5 155,73.5 155,59 160,59 160,98 140,98 140,82 139.5,81.5 139.5,75 136.5,72
VAR3 on Top Layer "VAR3_L01_P041" (solid, pour order 41): 133.947,97.079 134.947,98.079 139,98.079 139,82.632 137.947,81.579 134.579,81.579 133.579,80.579 130.5,80.579 130.5,85.132 133.947,88.579
NetC19_2 on Top Layer "NETC19_2_L01_P040" (solid, pour order 40): 111,103.5 118.5,103.5 125.5,96.5 125.5,87.5 119.5,87.5 119.5,92.5 117.86,94.14 111,94.14
NetC23_1 on Top Layer "NETC23_1_L01_P031" (solid, pour order 31): 86,97.75 86,102.25 103,102.25 103,97.75 102.5,97.25 102.5,87.75 100,87.75 99.5,88.25 99.5,93.25 95,97.75 87,97.75 86,98.75 87,97.75
Out_2 on Top Layer "OUT_2_L01_P030" (solid, pour order 30): 162.5,105.5 162.5,108.5 168,114 174,114 174,93.5 168,93.5
NetC13_1 on Top Layer "NETC13_1_L01_P029" (solid, pour order 29): 134.5,136.5 134.5,130.5 136.5,128.5 136.5,111 151,111 152,110 152,101 156.5,101 156.5,120.5 152,125 152,136.5
VAR2 on Top Layer "VAR2_L01_P028" (solid, pour order 28): 125.5,135.5 126.5,136.5 133.5,136.5 133.5,124 129.5,120 124.5,120 123.5,119 121,119 121,122.5 125.5,127
NetC11_2 on Top Layer "Top Layer-NetC11_2" (solid, pour order 27): 113.5,121.5 115,121.5 115,125 117.5,125 117.5,134 115,136.5 108,136.5 108,132 112,128 112,125 113.5,125
NetC3_2 on Top Layer "Top Layer-NetC3_2" (solid, pour order 26): 114,177.5 115.5,177.5 115.5,181 118,181 118,190 115.5,192.5 108.5,192.5 108.5,188 112.5,184 112.5,181 114,181
GND on Top Layer "GND_L01_P024" (solid, pour order 24): 106.5,136.5 106.5,115.5 104.5,115.5 104.5,125 104,125.5 104,131.5 102,131.5 101.5,132 101.5,136.5
NetC15_1 on Top Layer "NETC15_1_L01_P023" (solid, pour order 23): 86,126.75 86,131.25 103,131.25 103,126.75 102.5,126.25 102.5,116.75 100,116.75 99.5,117.25 99.5,122.25 95,126.75 87,126.75 86,127.75 87,126.75
GND on Top Layer "GND_L01_P022" (solid, pour order 22): 93.75,79 117.25,79 118.75,77.5 118.75,64.5 117.25,63 93.75,63
"+24 V" on Top Layer "+24_V_L01_P021" (solid, pour order 21): 53,96.5 52.5,97 52.5,103 53,103.5 73,103.5 73.5,103 73.5,97 73,96.5
GND on Top Layer "GND_L01_P019" (solid, pour order 19): 94,160.5 117.5,160.5 119,159 119,146 117.5,144.5 94,144.5
Out_1 on Top Layer "OUT_1_L01_P017" (solid, pour order 17): 162.5,158 162.5,161 168,166.5 174,166.5 174,146 168,146
NetC5_1 on Top Layer "NETC5_1_L01_P015" (solid, pour order 15): 136,193 136,187 138,185 138,167.5 152.5,167.5 153.5,166.5 153.5,157.5 157.5,157.5 157.5,158 157.5,177.5 153.5,181.5 153.5,193
VAR1 on Top Layer "VAR1_L01_P014" (solid, pour order 14): 126,192 127,193 134,193 134,180.5 130,176.5 125,176.5 124,175.5 121.5,175.5 121.5,179 126,183.5
GND on Top Layer "GND_L01_P010" (solid, pour order 10): 106,192.5 106,171.5 104,171.5 104,181 103.5,181.5 103.5,187.5 101.5,187.5 101,188 101,192.5
NetC7_1 on Top Layer "NETC7_1_L01_P008" (solid, pour order 8): 85.5,181.5 85.5,186 102.5,186 102.5,181.5 102,181 102,171.5 99.5,171.5 99,172 99,177 94.5,181.5 86.5,181.5 85.5,182.5 86.5,181.5
"+24 V" on Top Layer "+24_V_L01_P004" (solid, pour order 4): 53,183 57,183 59,185 74,185 74,195 52,195 52,184
GND on Bottom Layer "GND_L02_P009" (solid, pour order 9): 100,195 176,195 176,4 35,4 35,18 41.5,24.5 89.5,24.5 100,35
"+24 V" on Bottom Layer "+24_V_L02_P003" (solid, pour order 3): 4,195 4,38 96,38 96,195

## Silkscreen, mask and mechanical layers (free items; w line width, h text height)
Top Overlay:
  text "W8" at 38.254,191.754 h1.52
  text "W8" at 30.254,185.754 h1.52
  text "Switch 1" at 37.206,183.648 h1.52 r270
  text "VAR1 Good" at 164.746,173.254 h1.52 r90
  text "W7" at 30.04,168.15 h1.52
  text "W1" at 40.254,166.754 h1.52
  text "Battery 1" at 38.214,152.648 h1.52 r270
  text "W6" at 99.254,150.254 h1.52
  text "W7" at 30.294,147.6 h1.52
  text "W6" at 30.254,136.754 h1.52
  text "W2" at 38.254,129.754 h1.52
  text "Switch 1" at 38.206,122.648 h1.52 r270
  text "VAR2 Good" at 163.746,122.254 h1.52 r90
  text "W5" at 30.254,117.254 h1.52
  text "W5" at 41.754,108.254 h1.52
  text "W4" at 30.254,107.754 h1.52
  text "Battery 2" at 37.262,91.246 h1.52 r270
  text "W4" at 30.254,86.254 h1.52
  text "W3" at 30.254,75.254 h1.52
  text "VAR3 Good" at 166.246,69.754 h1.52 r90
  text "W3" at 99.754,68.754 h1.52
  text "W2" at 18.254,43.754 h1.52
  text "W1" at 32.254,43.754 h1.52
  text "24V Good" at 53.254,25.754 h1.52
  text "5V=3.3k || 12V=1.1k" at 98.754,24.754 h1.52
  text "VAR4 Good" at 164.746,22.754 h1.52 r90
  text "CUP Spring 2023 Power Board" at 66.254,10.262 h1.52
  text "Jonas Funk (jwf224) '24" at 66.254,7.262 h1.52
Board:
  lines w-2: 0,0.5 0,0 ; 0,0 0,200 180,200 180,0 0,0